# Allegro board LIDAR_READOUT_VER2.brd
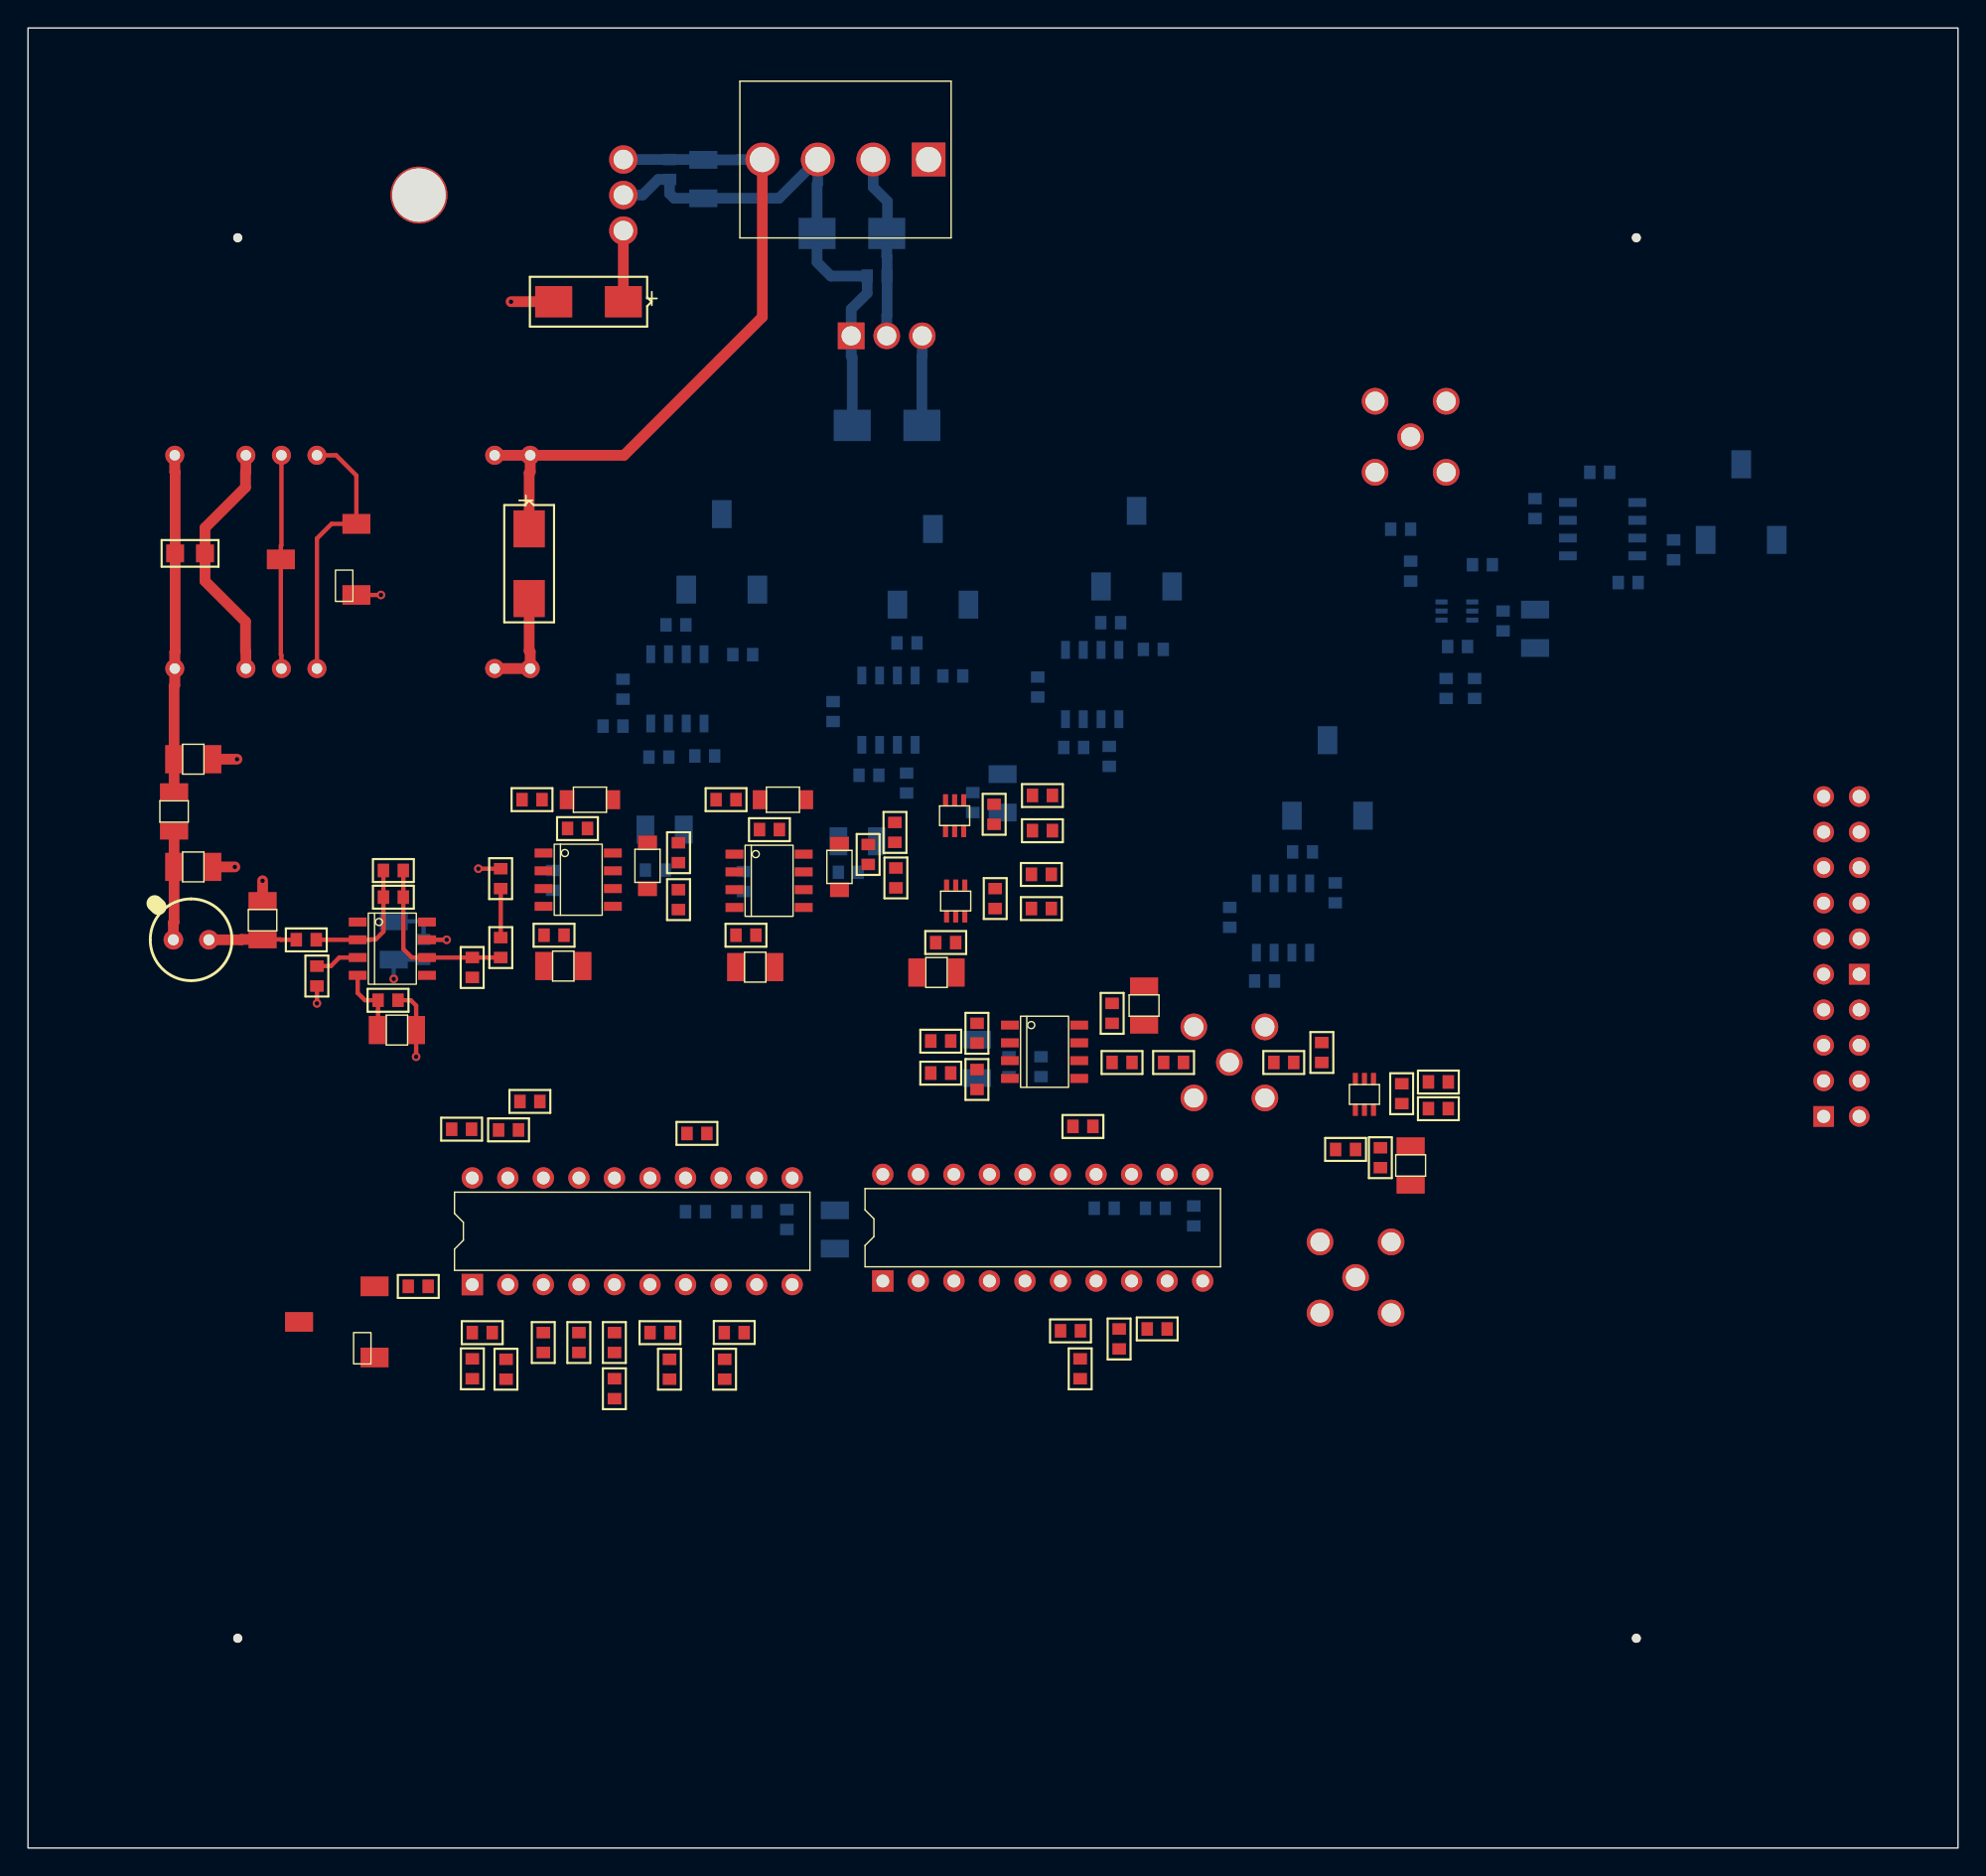
[diagram p0: board, top side]
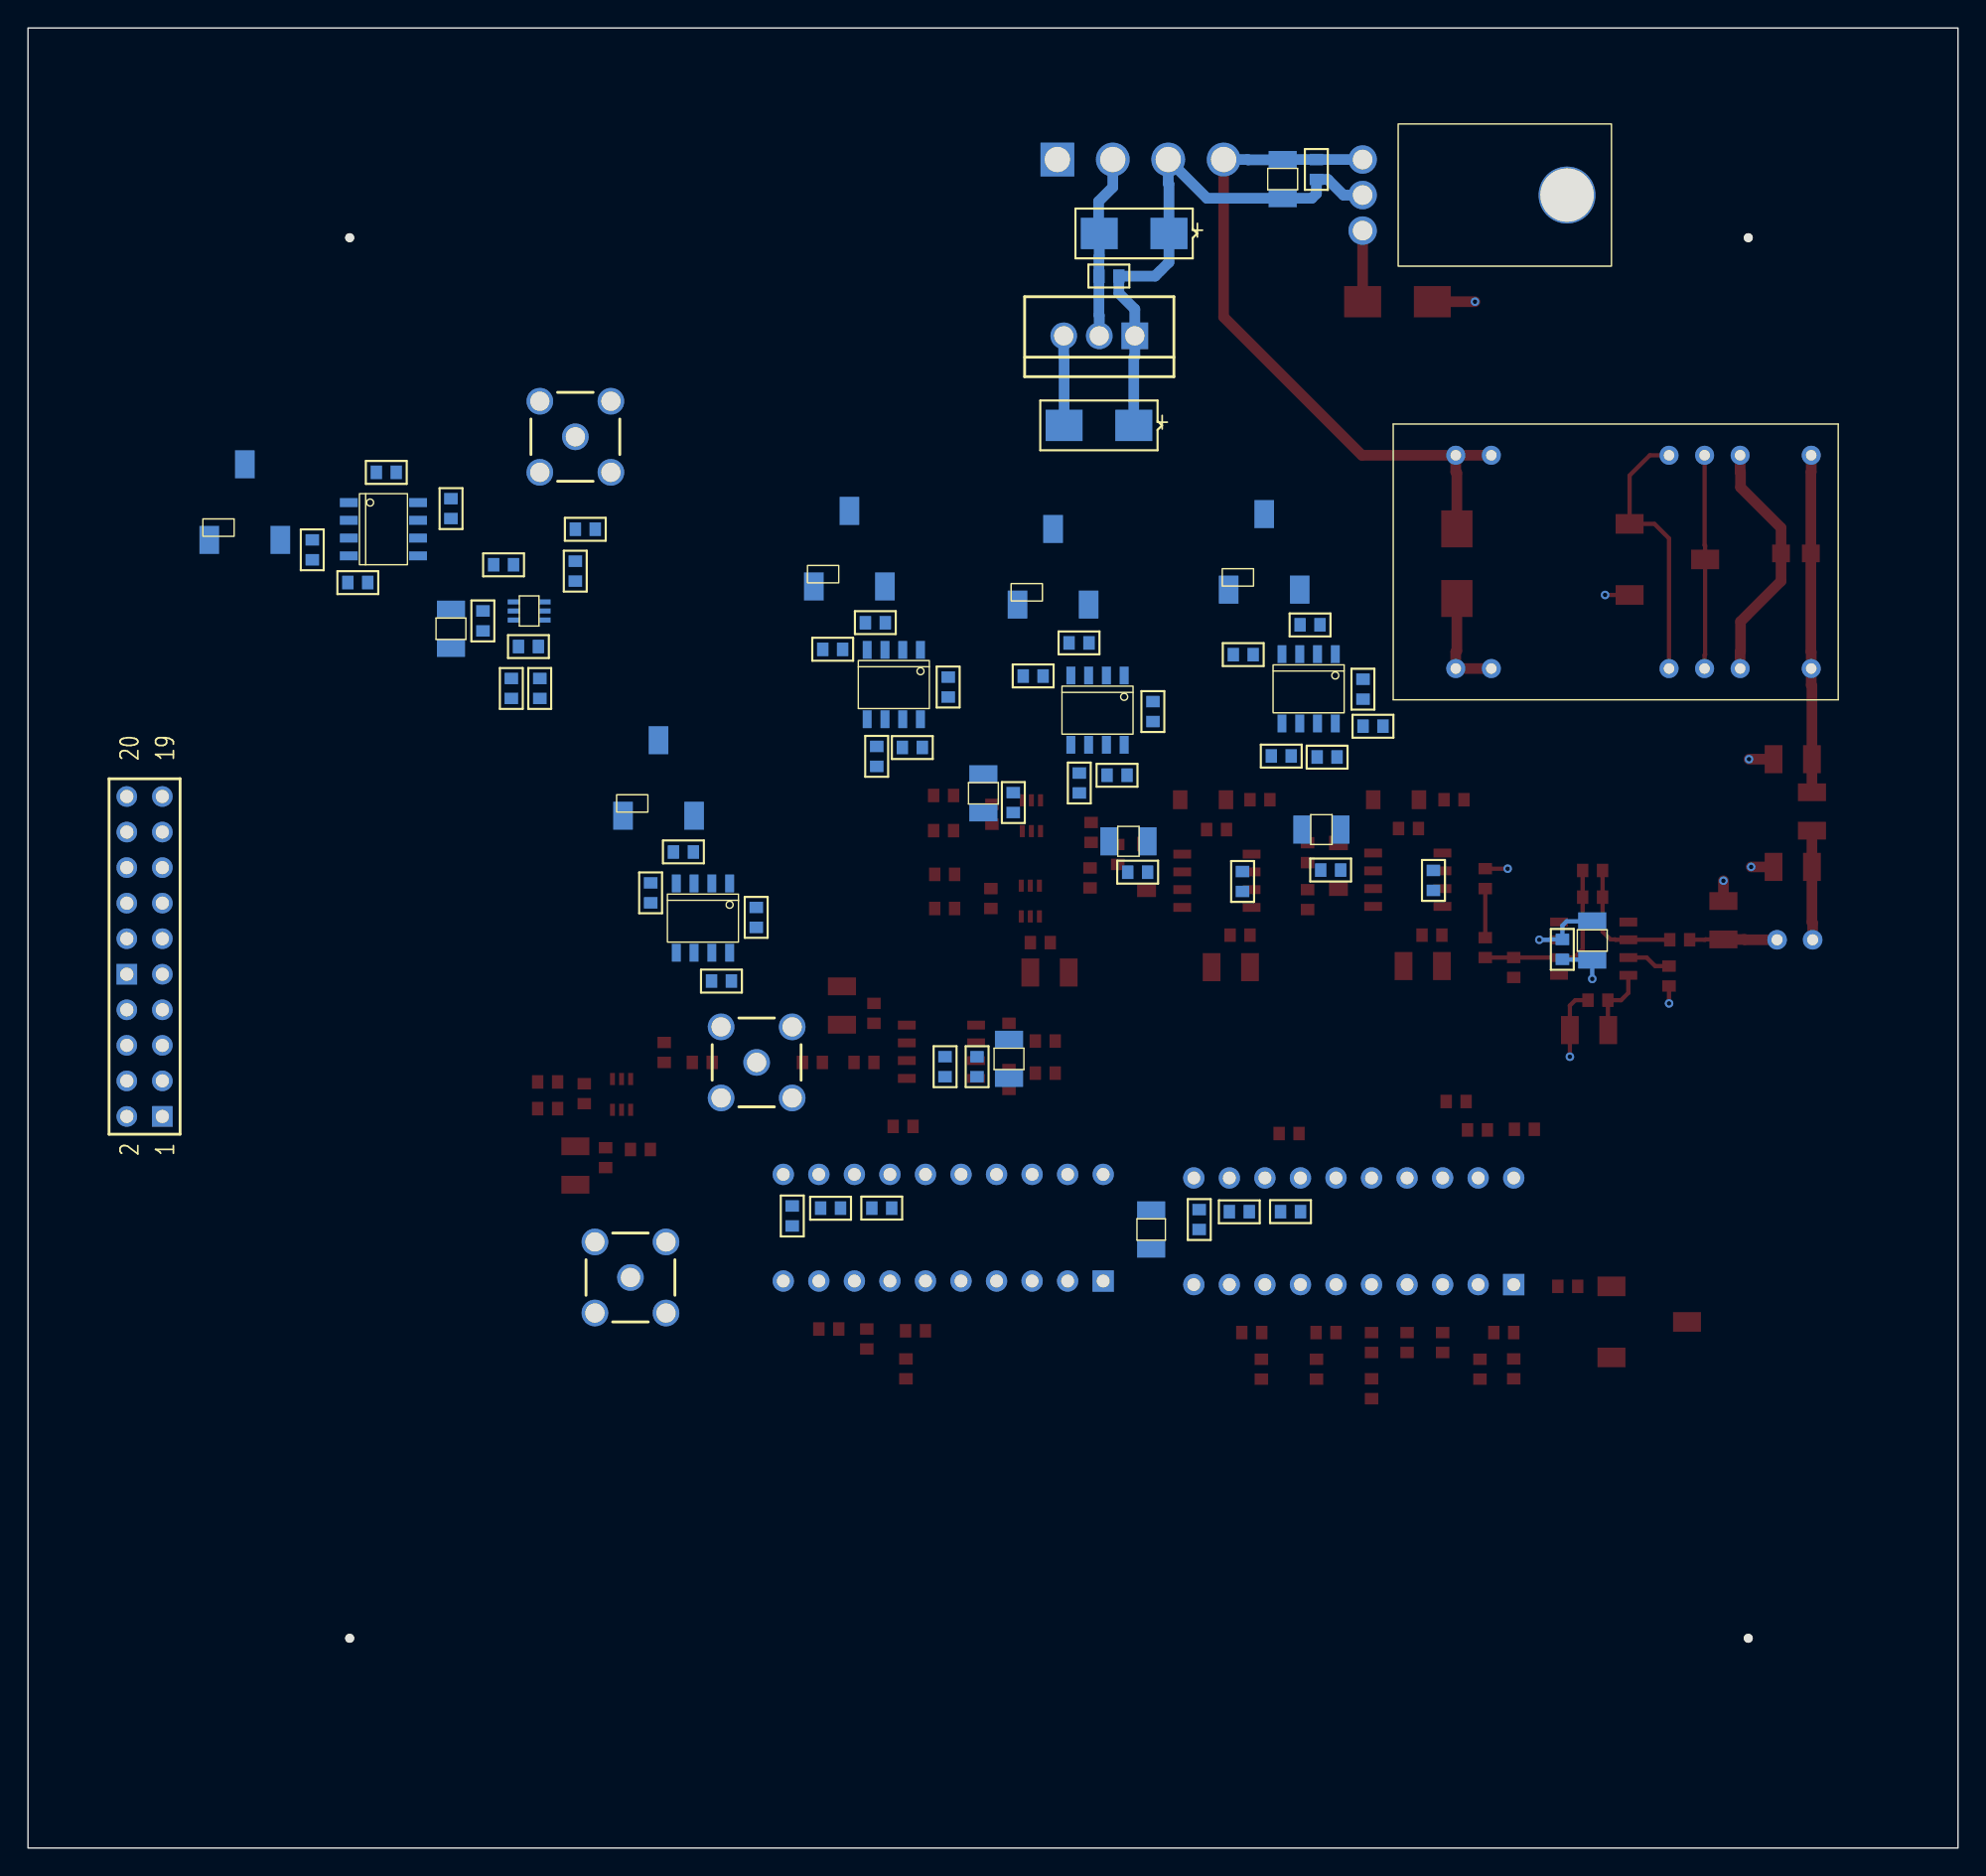
[diagram p1: board, bottom side, seen from below]

Outline 137.92 x 130.05 mm; copper layers: TOP, GROUND, POWER, BOTTOM. Coordinates in mm from the lower left corner of the outline.
Outline path: rectangle 0,0 137.92,130.05

## Design rules (mm)
constraint set DEFAULT: min track width 0.305

## Placement (name value [footprint] x y rotation side)
C1  100nF_1608  [SMC1608]  44.12 69.88 0 bottom
C2  6.8uF_3216  [SMC321612]  45.49 72.77 0 bottom
C3  100nF_1608  [SMC1608]  37.49 68.43 90 bottom
C4  100nF_1608  [SMC1608]  36.88 65.23 0 top
C5  6.8uF_3216  [SMC321612]  38.25 63.02 0 top
C6  100nF_1608  [SMC1608]  57.91 69.72 0 bottom
C7  6.8uF_3216  [SMC321612]  59.28 71.93 0 bottom
C8  0.1uF_1608  [SMC1608]  45.8 77.95 180 bottom
C9  0.1uF_1608  [SMC1608]  47.02 87.4 180 bottom
C10  100nF_1608  [SMC1608]  51.13 68.35 90 bottom
C11  100nF_1608  [SMC1608]  50.6 65.23 0 top
C12  6.8uF_3216  [SMC321612]  51.97 62.94 0 top
C13  0.1uF_1608  [SMC1608]  50.37 85.27 0 bottom
C14  0.1uF_1608  [SMC1608]  77.47 58.93 90 top
C15  6.8uF_3216  [SMC321612]  79.76 60.2 90 top
C16  0.1uF_1608  [SMC1608]  72.39 55.12 90 bottom
C17  0.1uF_1608  [SMC1608]  70.1 55.12 90 bottom
C18  6.8uF_3216  [SMC321612]  67.82 56.39 90 bottom
C19  47pF_1608  [SMC1608]  46.99 45.47 0 bottom
C20  47pF_1608  [SMC1608]  76.2 45.72 0 bottom
C21  0.1uF_1608  [SMC1608]  52.07 45.47 180 bottom
C22  0.1uF_1608  [SMC1608]  81.28 45.72 180 bottom
C23  0.1uF_1608  [SMC1608]  51.18 36.83 180 top
C24  0.1uF_1608  [SMC1608]  44.45 36.83 0 top
C25  0.1uF_1608  [SMC1608]  73.79 36.96 0 top
C26  0.1uF_1608  [SMC1608]  81.41 37.08 180 top
C27  0.1uF_1608  [SMC1608]  49.78 34.92 270 top
C28  0.1uF_1608  [SMC1608]  77.98 37.08 270 top
C29  0.1uF_1608  [SMC1608]  89.08 61.95 180 bottom
C30  0.1uF_1608  [SMC1608]  90.37 71.17 0 bottom
C31  0.1uF_1608  [SMC1608]  93.42 68.96 270 bottom
C32  0.1uF_1608  [SMC1608]  81.15 56.13 0 top
C33  10nF_1608  [SMC1608]  96.65 50.04 270 top
C34  6.8uF_3216  [SMC321612]  98.81 48.77 270 top
C35  47uF_6032  [SMC603212]  35.81 94.26 270 top
C36  4.7nF_2012_250V  [SMC2012]  10.52 92.51 0 top
C37  1.5pF_1608  [SMC1608]  25.4 69.85 0 top
C38  100nF_1608  [SMC1608]  28.27 64.92 270 bottom
C39  6.8uF_3216  [SMC321612]  26.14 64.85 270 bottom
C40  1nF_3216  [SMC321612]  11.81 77.8 0 top
C41  47nF_3216  [SMC321612]  11.81 70.1 0 top
C42  6.8uF_3216  [SMC321612]  26.37 58.45 0 top
C43  100nF_1608  [SMC1608]  25.02 60.58 0 top
C44  0.1uF_1608  [SMC1608]  60.81 76.66 180 bottom
C45  0.1uF_1608  [SMC1608]  62.1 86.11 0 bottom
C46  0.1uF_1608  [SMC1608]  65.38 83.74 0 bottom
C47  0.1uF_1608  [SMC1608]  67.51 73.99 90 bottom
C48  6.8uF_3216  [SMC321612]  69.65 75.36 90 bottom
C49  0.1uF_1608  [SMC1608]  75.44 78.64 180 bottom
C50  0.1uF_1608  [SMC1608]  76.66 87.55 0 bottom
C51  0.1uF_1608  [SMC1608]  79.71 85.65 0 bottom
C52  0.1uF_1608  [SMC1608]  66.29 64.69 180 top
C53  6.8uF_3216  [SMC321612]  64.92 62.56 180 top
C54  6.8uF_3216  [SMC321612]  48.26 119.25 270 bottom
C55  0.47uF_1608  [SMC1608]  45.85 120.65 270 bottom
C56  22uF_6032  [SMC603212]  42.55 110.49 180 top
C57  0.47uF_1608  [SMC1608]  59.97 112.32 0 bottom
C58  10uF_6032  [SMC603212]  56.39 115.37 0 bottom
C59  10uF_6032  [SMC603212]  58.9 101.65 0 bottom
C60  0.1uF_1608  [SMC1608]  107.7 95 90 bottom
C61  0.1uF_1608  [SMC1608]  117.6 93.47 270 bottom
C62  0.1uF_1608  [SMC1608]  115.06 90.42 180 bottom
C63  0.1uF_1608  [SMC1608]  105.41 88.39 270 bottom
C64  6.8uF_3216  [SMC321612]  107.7 87.12 270 bottom
D1  DIODE ZENER  [SMD_SOD123]  40.16 74.9 180 top
D2  SCHOTTKY_SOD123  [SMD_SOD123]  44.27 70.18 270 top
D3  DIODE ZENER  [SMD_SOD123]  53.95 74.9 180 top
D4  SCHOTTKY_SOD123  [SMD_SOD123]  57.99 70.1 270 top
D5  MTAPD-06-013  [TO46_2PIN]  10.39 64.9 0 top
J1  CON20A  [CON20A_100MIL]  128.32 52.27 90 bottom
JP1  4 HEADER  [HEADER4]  58.42 120.65 270 top
L1  CHOKE_3216  [SML3216]  57.66 44.2 270 bottom
NOREF  -  [unnamed]  114.94 115.06 0 top
NOREF#2  -  [unnamed]  14.99 115.06 0 top
NOREF#3  -  [unnamed]  14.99 14.99 0 top
NOREF#4  -  [unnamed]  114.94 14.99 0 top
R1  NC_1608  [SMR1608]  36.73 74.9 180 top
R2  249_1608  [SMR1608]  38.56 72.85 0 top
R3  16.7_1608  [SMR1608]  42.52 80.16 180 bottom
R4  0_1608  [SMR1608]  33.78 63.63 90 top
R5  NC_1608  [SMR1608]  33.78 69.98 270 top
R6  10_1608  [SMR1608]  46.48 70.41 90 top
R7  NC_1608  [SMR1608]  50.6 74.9 180 top
R8  16.7_1608  [SMR1608]  49.07 78.03 180 bottom
R9  249_1608  [SMR1608]  52.27 72.77 0 top
R10  200_1608  [SMR1608]  42.52 83.52 270 bottom
R11  20 kohm  [ST5EW]  52.12 89.92 90 bottom
R12  10_1608  [SMR1608]  60.05 71.7 270 top
R13  NC_1608  [SMR1608]  46.48 67.06 90 top
R14  NC_1608  [SMR1608]  67.82 58.93 270 top
R15  0_1608  [SMR1608]  64.52 57.66 0 top
R16  0_1608  [SMR1608]  64.52 55.37 0 top
R17  0_1608  [SMR1608]  77.47 56.13 0 top
R18  NC_1608  [SMR1608]  67.82 55.63 270 top
R19  10_1608  [SMR1608]  48.51 51.05 180 top
R20  10_1608  [SMR1608]  74.68 51.56 0 top
R21  NC_1608  [SMR1608]  36.58 53.34 180 top
R22  10_1608  [SMR1608]  54.23 44.2 90 bottom
R23  10_1608  [SMR1608]  83.31 44.45 90 bottom
R24  NC_1608  [SMR1608]  35.05 51.31 180 top
R25  0_1608  [SMR1608]  31.75 63.63 270 top
R26  NC_1608  [SMR1608]  31.7 51.36 180 top
R27  R_1608  [SMR1608]  31.75 33.53 90 top
R28  NC_1608  [SMR1608]  31.75 36.83 0 top
R29  NC_1608  [SMR1608]  41.91 36.83 270 top
R30  4.7_1608  [SMR1608]  75.18 33.53 90 top
R31  20 kohm  [ST5EW]  24.77 35.05 180 top
R32  4.7_1608  [SMR1608]  45.85 34.92 270 top
R33  NC_1608  [SMR1608]  27.18 40.13 0 top
R34  NC_1608  [SMR1608]  34.16 34.92 270 top
R35  NC_1608  [SMR1608]  36.83 36.83 270 top
R36  NC_1608  [SMR1608]  39.37 36.83 270 top
R37  NC_1608  [SMR1608]  41.91 33.53 270 top
R38  200_1608  [SMR1608]  85.88 67.21 270 bottom
R39  20 kohm  [ST5EW]  95.4 73.76 90 bottom
R40  200_1608  [SMR1608]  89.03 56.13 0 top
R41  0_1608  [SMR1608]  100.08 54.74 0 top
R42  50_1608  [SMR1608]  92.46 56.13 90 top
R43  100_1608  [SMR1608]  98.17 54.61 270 top
R44  0_1608  [SMR1608]  100.08 52.83 0 top
R45  50_1608  [SMR1608]  94.87 49.91 180 top
R46  5 kohm  [ST5EW]  23.47 89.53 180 top
R47  20k_3216  [SMR3216]  10.44 74.07 270 top
R48  100_1608  [SMR1608]  25.4 67.94 0 top
R49  0_1608  [SMR1608]  19.18 64.9 0 top
R50  50_1608  [SMR1608]  20.65 63.02 270 top
R51  NC_3216  [SMR3216]  16.76 66.29 90 top
R52  200_1608  [SMR1608]  57.53 81.92 270 bottom
R53  0_1608  [SMR1608]  61.95 71.86 90 top
R54  0_1608  [SMR1608]  71.78 75.21 0 top
R55  20 kohm  [ST5EW]  67.21 88.85 90 bottom
R56  0_1608  [SMR1608]  62.79 76.81 270 bottom
R57  100_1608  [SMR1608]  69.04 73.15 90 top
R58  0_1608  [SMR1608]  71.78 72.69 0 top
R59  0_1608  [SMR1608]  71.7 69.57 0 top
R60  200_1608  [SMR1608]  72.16 83.67 270 bottom
R61  20 kohm  [ST5EW]  81.76 90.14 90 bottom
R62  100_1608  [SMR1608]  69.11 67.13 90 top
R63  0_1608  [SMR1608]  77.27 78.71 270 bottom
R64  0_1608  [SMR1608]  62.03 70.03 270 top
R65  0_1608  [SMR1608]  71.7 67.13 0 top
R66  200_1608  [SMR1608]  113.03 98.3 180 bottom
R67  20 kohm  [ST5EW]  124.97 93.47 90 bottom
R68  0_1608  [SMR1608]  104.65 91.69 180 bottom
R69  0_1608  [SMR1608]  101.35 83.57 270 bottom
R70  100_1608  [SMR1608]  102.87 85.85 180 bottom
R71  0_1608  [SMR1608]  103.38 83.57 270 bottom
R72  0_1608  [SMR1608]  98.81 91.95 270 bottom
R73  50_1608  [SMR1608]  98.81 94.23 180 bottom
U1  OPA695  [SOIC8]  39.32 69.19 0 top
U2  OPA695  [SOIC8]  52.96 69.11 0 top
U3  OPA277  [SOIC8]  46.41 82.83 270 bottom
U4  LMH6704  [SOIC8]  72.64 56.9 0 top
U5  AD641  [DIP20_3]  31.75 40.26 90 top
U6  AD641  [DIP20_3]  61.09 40.51 90 top
U7  OPA277  [SOIC8]  89.69 66.45 270 bottom
U8  TLV3604  [SC70_6PIN]  95.5 53.85 270 top
U9  SMA_CON  [RFSMAV]  85.85 56.13 180 bottom
U10  SMA_CON  [RFSMAV]  94.87 40.77 180 bottom
U11  R12_150B  [R12_150]  24.46 91.9 90 bottom
U12  OPA657  [SOIC8]  26.04 64.26 0 top
U13  OPA277  [SOIC8]  61.49 81.31 270 bottom
U14  TLV3604  [SC70_6PIN]  66.22 73.76 270 top
U15  OPA277  [SOIC8]  76.05 83.13 270 bottom
U16  TLV3604  [SC70_6PIN]  66.29 67.67 270 top
U17  LM2940  [LM2940_TO220]  42.55 120.65 270 bottom
U18  LM2990  [LM2990_TO220AB]  58.83 108.05 0 bottom
U19  OPA277  [SOIC8]  112.52 94.23 180 bottom
U20  TLV3604  [SC70_6PIN]  102.11 88.39 0 bottom
U21  SMA_CON  [RFSMAV]  98.81 100.84 180 bottom

## Library data of the parts
C1-C14 C16 C17 C19-C34 C44-C53 C55 C57 C60-C64 = CAP_2012
C15 C18 C39-C42 C54 = CAP_3216
C35 C56 C58 C59 = CAP POL
C36 = CAP_5750_250V
C37 C38 C43 = CAP_1608
D1 D3 = DIODE ZENER
D2 D4 = DIODE SCHOTTKY
D5 = MTAPD-06-013
J1 = CON20A
JP1 = 4 HEADER_0
L1 = CHOKE
R1-R10 R12-R30 R32-R38 R40-R45 R48-R50 R52-R54 R56-R60 R62-R66 R68-R73 = R_1608
R11 R31 R39 R46 R55 R61 R67 = RESISTOR VAR
R47 R51 = R_3216
U1 U2 = OPA695: Tolerance: ***; User Part Number: ***
U3 U7 U13 U15 U19 = OPA277: Tolerance: ***; User Part Number: ***
U4 = LMH6704: Tolerance: ***; User Part Number: ***
U5 U6 = AD641: Tolerance: ***; User Part Number: ***
U8 U14 U16 U20 = TLV3604
U9 U10 U21 = SMA_CON
U11 = R12_150B
U12 = OPA657: Tolerance: ***; User Part Number: ***
U17 = LM2940
U18 = LM2990

## Footprints (pads in the part's own frame, mm; a bottom-side part is the same pattern mirrored in y, then rotated)
CON20A_100MIL
  rect 1.473x1.473 hole 0.94: 1(0,0) 10(10.16,2.54)
  round 1.473 hole 0.94: 2(0,2.54) 3(2.54,0) 4(2.54,2.54) 5(5.08,0) 6(5.08,2.54) 7(7.62,0) 8(7.62,2.54) 9(10.16,0) 11(12.7,0) 12(12.7,2.54) 13(15.24,0) 14(15.24,2.54) 15(17.78,0) 16(17.78,2.54) 17(20.32,0) 18(20.32,2.54) 19(22.86,0) 20(22.86,2.54)
DIP20_3
  rect 1.524x1.524 hole 0.914: 1(0,0)
  round 1.524 hole 0.914: 2(0,-2.54) 3(0,-5.08) 4(0,-7.62) 5(0,-10.16) 6(0,-12.7) 7(0,-15.24) 8(0,-17.78) 9(0,-20.32) 10(0,-22.86) 11(7.62,-22.86) 12(7.62,-20.32) 13(7.62,-17.78) 14(7.62,-15.24) 15(7.62,-12.7) 16(7.62,-10.16) 17(7.62,-7.62) 18(7.62,-5.08) 19(7.62,-2.54) 20(7.62,0)
HEADER4
  rect 2.41x2.41 hole 1.801: 1(0,5.941)
  round 2.41 hole 1.801: 2(0,1.981) 3(0,-1.981) 4(0,-5.941)
LM2940_TO220
  round 2.032 hole 1.397: 1(0,0) 2(2.54,0) 3(5.08,0)
  round 4.064 hole 3.81: 4(2.54,14.605)
LM2990_TO220AB
  rect 1.905x1.905 hole 1.372: 1(0,0)
  round 1.905 hole 1.372: 2(2.54,0) 3(5.08,0)
R12_150
  round 1.359 hole 0.749: 2(-7.62,11.43) 3(-7.62,8.89) 8(-7.62,-3.81) 9(-7.62,-6.35) 10(-7.62,-8.89) 12(-7.62,-13.97) 13(7.62,-13.97) 15(7.62,-8.89) 16(7.62,-6.35) 17(7.62,-3.81) 22(7.62,8.89) 23(7.62,11.43)
RFSMAV
  round 1.905 hole 1.372: 1(0,0) 2(-2.54,-2.54) 3(2.54,-2.54) 4(2.54,2.54) 5(-2.54,2.54)
SC70_6PIN
  rect 0.864x0.356 smd: 1(-1.1,0.65) 2(-1.1,0) 3(-1.1,-0.65) 4(1.1,-0.65) 5(1.1,0) 6(1.1,0.65)
SMC1608
  rect 0.813x0.965 smd: 1(0,0) 2(1.422,0)
SMC2012
  rect 1.27x1.27 smd: 1(0,0) 2(2.134,0)
SMC321612
  rect 1.27x2.007 smd: 1(-1.372,0) 2(1.372,0)
SMC603212
  rect 2.642x2.235 smd: 1(0,0) 2(4.978,0)
SMD_SOD123
  rect 1.036x1.346 smd: 1(-1.636,0) 2(1.636,0)
SML3216
  rect 1.27x2.007 smd: 1(-1.372,0) 2(1.372,0)
SMR1608
  rect 0.813x0.965 smd: 1(0,0) 2(1.422,0)
SMR3216
  rect 1.27x2.007 smd: 1(-1.372,0) 2(1.372,0)
SOIC8
  rect 1.27x0.635 smd: 1(-2.477,1.905) 2(-2.477,0.635) 3(-2.477,-0.635) 4(-2.477,-1.905) 5(2.477,-1.905) 6(2.477,-0.635) 7(2.477,0.635) 8(2.477,1.905)
ST5EW
  rect 1.999x1.4 smd: 1(0,0) 2(0,-5.08) 3(5.397,-2.54)
TO46_2PIN
  round 1.397 hole 0.787: 1(0,0) 2(2.54,0)
unnamed
  round 0.635 hole 5.999 unplated: (0,0)

## Nets
12V: C35.1 C54.1 C55.1 JP1.4 U11.22 U11.23 U17.1
-12V: C57.2 C58.2 JP1.2 U18.2
GND: C1.2 C2.2 C4.2 C5.2 C6.2 C7.2 C8.2 C9.2 C11.2 C12.2 C13.2 C14.2 C15.2 C17.2 C18.2 C19.2 C20.2 C21.2 C22.2 C27.2 C28.2 C29.2 C30.2 C31.2 C33.2 C34.2 C35.2 C36.2 C38.2 C39.2 C40.2 C41.2 C42.2 C43.2 C44.2 C45.2 C46.2 C47.2 C48.2 C49.2 C50.2 C51.2 C52.2 C53.2 C54.2 C55.2 C56.2 C57.1 C58.1 C59.1 C60.2 C61.2 C62.2 C63.2 C64.2 J1.2 J1.4 J1.6 J1.8 J1.10 J1.12 J1.14 J1.16 J1.18 J1.20 JP1.3 R1.2 R5.1 R7.2 R13.1 R14.1 R16.1 R18.2 R21.1 R26.2 R27.1 R34.2 R35.2 R36.2 R37.2 R42.2 R45.2 R46.1 R50.2 R51.2 R73.2 U5.13 U5.15(RG2) U5.16 U5.17 U5.18 U6.2 U6.3 U6.4 U6.5 U6.8 U6.13 U6.15(RG2) U6.16 U6.17 U6.18 U6.19 U8.2(VEE) U9.2 U9.3 U9.4 U9.5 U10.2 U10.3 U10.4 U10.5 U11.2 U11.3 U11.10 U11.15 U14.2(VEE) U16.2(VEE) U17.2 U17.4 U18.1 U20.2(VEE) U21.2 U21.3 U21.4 U21.5
+VS_5V: C1.1 C2.1 C3.2 C6.1 C7.1 C8.1 C10.2 C14.1 C15.1 C16.2 C29.1 C33.1 C34.1 C38.1 C39.1 C44.1 C47.1 C48.1 C49.1 C52.1 C53.1 C56.1 C60.1 C63.1 C64.1 R11.1 R22.1 R23.1 R31.1 R39.1 R55.1 R61.1 R67.1 U1.7 U2.7 U3.7 U4.7 U7.7 U8.5 U12.7 U13.7 U14.5 U15.7 U16.5 U17.3(OUT) U19.7 U20.5
-VS_5V: C3.1 C4.1 C5.1 C10.1 C11.1 C12.1 C13.1 C16.1 C17.1 C18.1 C31.1 C42.1 C43.1 C46.1 C51.1 C59.2 C62.1 R11.3 R30.1 R31.3 R32.2 R39.3 R55.3 R61.3 R67.3 U1.4 U2.4 U3.4 U4.4 U7.4 U12.4 U13.4 U15.4 U18.3(OUT) U19.4
DUALAMP_OUT: R12.2 R53.1 R64.1
FALL_LED_N: J1.13 R65.2
FALL_LED_P: J1.15 R59.2
LOGAMP_OUT: C32.1 R17.2
PD_SIG: D5.2 R49.1 R51.1
RISE_LED_N: J1.17 R58.2
RISE_LED_P: J1.19 R54.2
TIA_OUT: C37.2 R4.1 R25.1 R29.2 R37.1 R48.2 U12.6(OUT)
TRIGGER_N: J1.9 R71.2
TRIGGER_P: J1.11 R69.2
VPD_BIAS: C36.1 C40.1 R47.1 U11.12 U11.13
N02448: C41.1 D5.1(CATHODE) R47.2
N06306: C37.1 R48.1 R49.2 U12.2
N06673: R50.1 U12.3
N07370: R24.2 R25.2 R26.1 U5.20
N07374: R21.2 R24.1 U5.19
N07386: R27.2 R28.1 R33.2 U5.1
N07390: R28.2 R34.1 U5.2
N07414: R35.1 U5.3
N07418: R36.1 U5.4
N08194: R29.1 U5.5
N08685: C24.1 U5.6
N08698: C23.2 C24.2 C27.1 R32.1 U5.7
N08811: C23.1 U5.9
N10504: R31.2(WIPER) R33.1
N10575: C19.1 R19.2 U5.14
N10750: C21.1 R22.2 U5.12
N11884: L1.2 U5.10 U6.1
N11896: L1.1 U5.11 U6.20
N13370: C20.1 R20.2 U6.14
N13878: C22.1 R23.2 U6.12
N14813: C25.1 U6.6
N14817: C25.2 C26.2 C28.1 R30.2 U6.7
N14841: C26.1 U6.9
N18619: R15.1 R19.1 R20.1
N18646: R14.2 R15.2 U4.2
N18650: R16.2 R18.1 U4.3
N21415: C30.1 R39.2(WIPER) U7.3
N21464: R38.2 R40.2 R42.1 U7.6 U8.3
N21476: R38.1 U7.2
N21515: C32.2 R40.1 U9.1(SIG)
N22112: R41.1 R43.1 U8.1
N22127: R43.2 R44.1 U8.6
N22204: R45.1 U8.4 U10.1(SIG)
N23346: J1.1 R44.2
N23373: J1.3 R41.2
N26081: R4.2 R5.2 U1.3
N26158: R6.1 R13.2 U2.3
N26293: D1.2 R1.1 R2.1 R3.2 U1.2
N26337: D1.1(CATHODE) D2.1 R2.2 R6.2
N26524: D3.2 R7.1 R8.1 R9.1 U2.2
N26546: D3.1(CATHODE) D4.1 R9.2 R12.1
N27092: R17.1 U4.6(OUT)
N29940: R10.1 U3.2
N29948: R3.1 R8.2 R10.2 U3.6
N30038: C9.1 R11.2(WIPER) U3.3
N31016: D2.2(CATHODE) U1.6(OUT)
N31106: D4.2(CATHODE) U2.6(OUT)
N34481: R46.2(WIPER) U11.8 U11.17
N34555: R46.3 U11.9 U11.16(VREF1)
N35748: C45.1 R55.2(WIPER) U13.3
N35766: R52.1 U13.2
N35782: R52.2 R56.1 U13.6
N35880: C50.1 R61.2(WIPER) U15.3
N35901: R60.1 U15.2
N35913: R60.2 R63.1 U15.6
N36382: R62.1 R65.1 U16.6
N36394: R59.1 R62.2 U16.1
N36406: R57.1 R58.1 U14.6
N36421: R54.1 R57.2 U14.1
N36433: R53.2 U14.3
N36440: R64.2 U16.4
N36471: R56.2 U14.4
N36489: R63.2 U16.3
N41077: R66.1 U19.2
N41085: R66.2 R68.1 U19.6
N41191: C61.1 R67.2(WIPER) U19.3
N41211: R68.2 U20.4
N41529: R72.1 R73.1 U21.1(SIG)
N41622: R72.2 U20.3
N41672: R69.1 R70.2 U20.1
N41690: R70.1 R71.1 U20.6

Pads without a net: J1 5 7; JP1 1; U1 1 5 8; U2 1 5 8; U3 1 5 8; U4 1 5 8; U5 8; U6 10 11; U7 1 5 8; U12 1 5 8; U13 1 5 8; U15 1 5 8; U19 1 5 8

## Via types
v1: diameter 0.61, hole 0.33, TOP to BOTTOM, 10 vias

## Routing (per net, layer and track width the routed paths; a pad name or vN(x,y) marks a point on that pad's centre or on a via; arc(x,y) is an arc through that point)
12V: length 49.7
  TOP w0.762: U11.23 42.6,99.52 52.48,109.4 JP1.4 ; U11.23 35.89,98.33 35.81,98.25 C35.1 ; U11.23 U11.22
  BOTTOM w0.762: JP1.4 50.76,120.65 50.74,120.62 C54.1 48.23,120.65 C55.1 U17.1
-12V: length 13.1
  BOTTOM w0.762: JP1.2 60.4,118.67 61.42,117.65 61.42,115.42 C58.2 61.37,113.74 61.39,113.72 C57.2 61.39,109.54 61.37,109.51 U18.2
GND: length 286.8
  TOP w0.305: R50.2 v1(20.65,60.35) ; R46.1 v1(25.22,89.53) ; C43.2 27.36,60.58 27.74,60.2 C42.2 v1(27.74,56.54) ; R5.1 v1(32.18,69.98)
  TOP w0.762: C41.2 v1(14.78,70.1) ; U11.3 U11.2 35.89,85.47 35.81,85.54 C35.2 ; U11.10 15.57,85.47 15.54,85.49 15.54,87.63 12.65,90.53 C36.2 12.65,94.34 15.54,97.23 15.54,98.3 15.57,98.33 U11.15 ; C56.2 v1(34.52,110.49) ; C40.2 v1(14.94,77.8) ; R51.2 v1(16.76,69.11)
  GROUND w0.305: 25.47,118.11 U17.4 ; U17.4 27.94,120.58 ; U17.4 30.41,118.11 ; U17.4 27.94,115.64 ; 56.44,118.95 JP1.3 ; JP1.3 56.44,122.35 ; JP1.3 54.73,120.65 ; JP1.3 58.14,120.65 ; U9.3 84.83,53.59 ; U9.3 81.8,53.59 ; U9.3 83.31,55.11 ; U9.3 83.31,52.08 ; 14.39,84.28 U11.10 ; U11.10 16.75,84.28 ; U11.10 15.57,83.1 ; U11.10 15.57,85.46 ; 99.83,98.3 U21.2 ; U21.2 102.86,98.3 ; U21.2 101.35,96.78 ; U21.2 101.35,99.81 ; 94.75,98.3 U21.3 ; U21.3 96.27,96.78 ; U21.3 96.27,99.81 ; U21.3 97.78,98.3 ; 68.71,39.25 U6.4 ; U6.4 67.45,40.51 ; U6.4 68.71,41.77 ; U6.4 69.97,40.51 ; 35.57,47.88 U5.18 ; U5.18 36.83,46.62 ; U5.18 36.83,49.14 ; U5.18 38.09,47.88 ; U6.2 63.63,41.77 ; U6.2 63.63,39.25 ; U6.2 62.37,40.51 ; U6.2 64.89,40.51 ; U6.18 67.43,48.13 ; U6.18 64.91,48.13 ; U6.18 66.17,46.87 ; U6.18 66.17,49.39 ; U6.17 68.71,49.39 ; U6.17 68.71,46.87 ; U6.17 69.97,48.13 ; U6.17 67.45,48.13 ; U6.15 73.79,49.39 ; U6.15 73.79,46.87 ; U6.15 72.53,48.13 ; U6.15 75.05,48.13 ; U6.13 78.87,49.39 ; U6.13 77.61,48.13 ; U6.13 78.87,46.87 ; U6.13 80.13,48.13 ; U10.4 93.84,43.31 ; U10.4 92.33,44.82 ; U10.4 90.82,43.31 ; U10.4 92.33,41.79 ; 58.83,106.54 U18.1 ; U18.1 57.31,108.05 ; U18.1 58.83,109.57 ; 44.45,46.62 U5.15 ; U5.15 44.45,49.14 ; U5.15 43.19,47.88 ; U5.15 45.71,47.88 ; U11.3 34.53,84.28 ; U11.3 33.35,83.1 ; U11.3 33.35,85.46 ; U11.3 32.17,84.28 ; U11.2 37.07,84.28 ; U11.2 34.71,84.28 ; U11.2 35.89,85.46 ; U11.2 35.89,83.1 ; U6.8 78.87,41.77 ; U6.8 78.87,39.25 ; U6.8 77.61,40.51 ; U6.8 80.13,40.51 ; 71.25,46.87 U6.16 ; U6.16 69.99,48.13 ; U6.16 71.25,49.39 ; U6.16 72.51,48.13 ; 71.25,39.25 U6.5 ; U6.5 72.51,40.51 ; U6.5 71.25,41.77 ; U6.5 69.99,40.51 ; 81.8,58.67 U9.4 ; U9.4 84.83,58.67 ; U9.4 83.31,60.19 ; U9.4 83.31,57.16 ; 15.57,98.34 U11.15 ; U11.15 15.57,100.7 ; U11.15 14.39,99.52 ; U11.15 16.75,99.52 ; U9.2 88.39,55.11 ; U9.2 88.39,52.08 ; U9.2 89.91,53.59 ; U9.2 86.88,53.59 ; 99.83,103.38 U21.5 ; U21.5 101.35,104.89 ; U21.5 101.35,101.86 ; U21.5 102.86,103.38 ; 95.9,38.23 U10.2 ; U10.2 97.41,39.74 ; U10.2 97.41,36.71 ; U10.2 98.92,38.23 ; U21.4 96.27,104.89 ; U21.4 97.78,103.38 ; U21.4 94.75,103.38 ; U21.4 96.27,101.86 ; 43.93,118.11 U17.2 41.16,118.11 ; 86.88,58.67 U9.5 ; U9.5 88.39,57.16 ; U9.5 89.91,58.67 ; U9.5 88.39,60.19 ; U6.3 67.43,40.51 ; U6.3 66.17,41.77 ; U6.3 64.91,40.51 ; U6.3 66.17,39.25 ; 130.86,50.98 J1.2 132.16,52.27 ; U5.16 41.91,49.14 ; U5.16 40.65,47.88 ; U5.16 43.17,47.88 ; U5.16 41.91,46.62 ; 130.86,76.43 J1.20 132.16,75.13 ; U6.19 64.89,48.13 ; U6.19 63.63,46.87 ; U6.19 63.63,49.39 ; U6.19 62.37,48.13 ; 39.37,46.62 U5.17 ; U5.17 39.37,49.14 ; U5.17 40.63,47.88 ; U5.17 38.11,47.88 ; 90.82,38.23 U10.3 ; U10.3 92.33,39.74 ; U10.3 93.84,38.23 ; U10.3 92.33,36.71 ; 97.41,41.79 U10.5 ; U10.5 97.41,44.82 ; U10.5 98.92,43.31 ; U10.5 95.9,43.31 ; U5.13 50.79,47.88 ; U5.13 49.53,46.62 ; U5.13 49.53,49.14 ; U5.13 48.27,47.88
  BOTTOM w0.305: C38.2 28.24,63.47 C39.2 v1(26.14,62.1)
  BOTTOM w0.762: U17.2 43.92,118.11 45.03,119.23 C55.2 45.85,118.21 46.18,117.88 C54.2 53.67,117.88 JP1.3 56.44,118.93 56.39,118.88 C58.1 56.39,113.31 57.38,112.32 C57.1 59.97,111.1 58.83,109.96 U18.1 58.83,106.59 58.9,106.51 C59.1
+VS_5V: length 11.4
  TOP w0.305: U12.7 v1(29.92,64.9)
  TOP w0.762: C56.1 U17.3
  BOTTOM w0.305: C39.1 27.97,66.22 28.27,65.91 C38.1 29.16,64.92 29.18,64.9 v1(29.92,64.9)
-VS_5V: length 11.5
  TOP w0.305: C42.1 25.02,58.47 C43.1 24.08,60.58 23.56,61.1 U12.4
  BOTTOM w0.762: C59.2 63.88,106.56 63.91,106.59 U18.3
PD_SIG: length 6.3
  TOP w0.305: R49.1 18.07,64.9 18.05,64.92 R51.1
  TOP w0.762: R51.1 15.25,64.92 15.23,64.9 D5.2
TIA_OUT: length 12.8
  TOP w0.305: C37.2 R48.2 26.82,64.24 27.43,63.63 U12.6 R25.1 R4.1
VPD_BIAS: length 24.1
  TOP w0.762: U11.13 10.49,98.33 10.52,98.3 C36.1 10.52,85.49 10.49,85.47 U11.12 10.49,83.09 10.44,83.04 C40.1 R47.1
N02448: length 7.8
  TOP w0.762: D5.1 10.39,66.11 10.44,66.16 C41.1 R47.2
N06306: length 9.4
  TOP w0.305: R49.2 U12.2 24.47,64.9 24.5,64.92 24.84,64.92 25.4,65.48 R48.1 C37.1
N06673: length 3.2
  TOP w0.305: R50.1 21.64,63.02 22.25,63.63 U12.3
N26081: length 3.5
  TOP w0.305: R4.2 R5.2
N34481: length 19.4
  TOP w0.305: U11.8 20.65,93.57 21.69,94.61 R46.2 23.47,98.07 22.02,99.52 U11.17
N34555: length 15.3
  TOP w0.305: U11.16 18.11,93.09 18.07,93.06 R46.3 18.07,85.28 18.11,85.24 U11.9

## Copper pours and planes (outline as drawn; the poured copper is in the pictures)
GND on GROUND: 0.76,129.03 0.76,1.27 136.65,1.27 136.65,129.03
